# EAGLE board NerdKit (EAGLE 7.4.0)
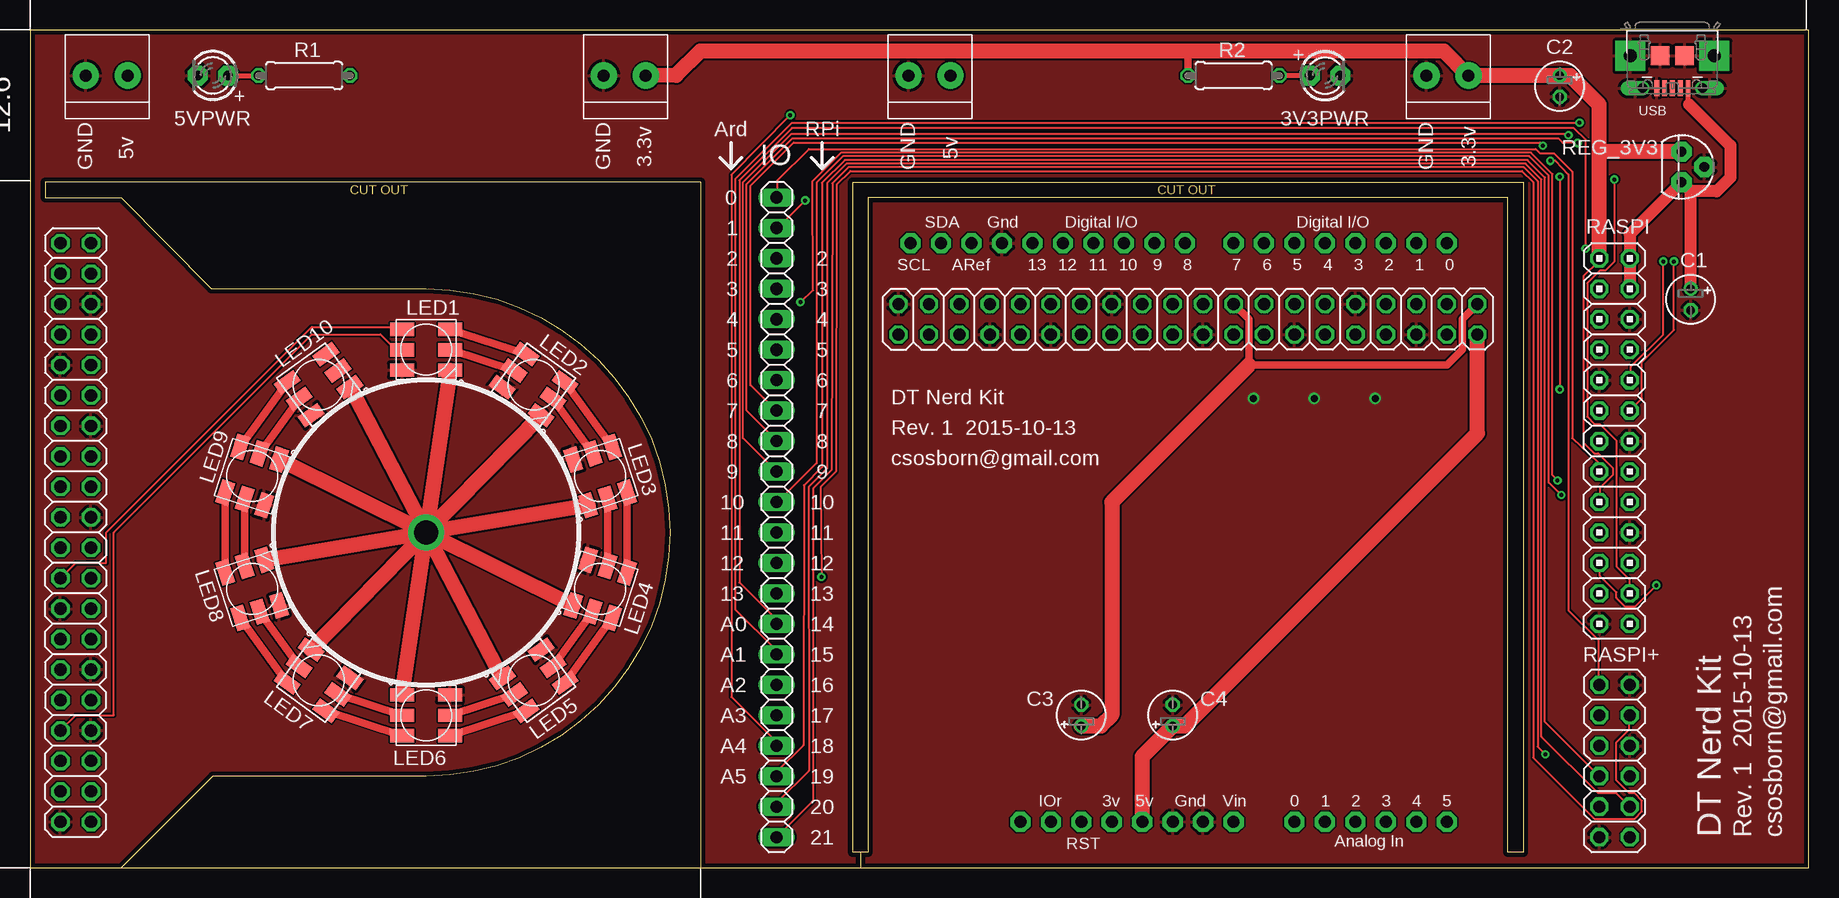
[diagram p0: board, top side]
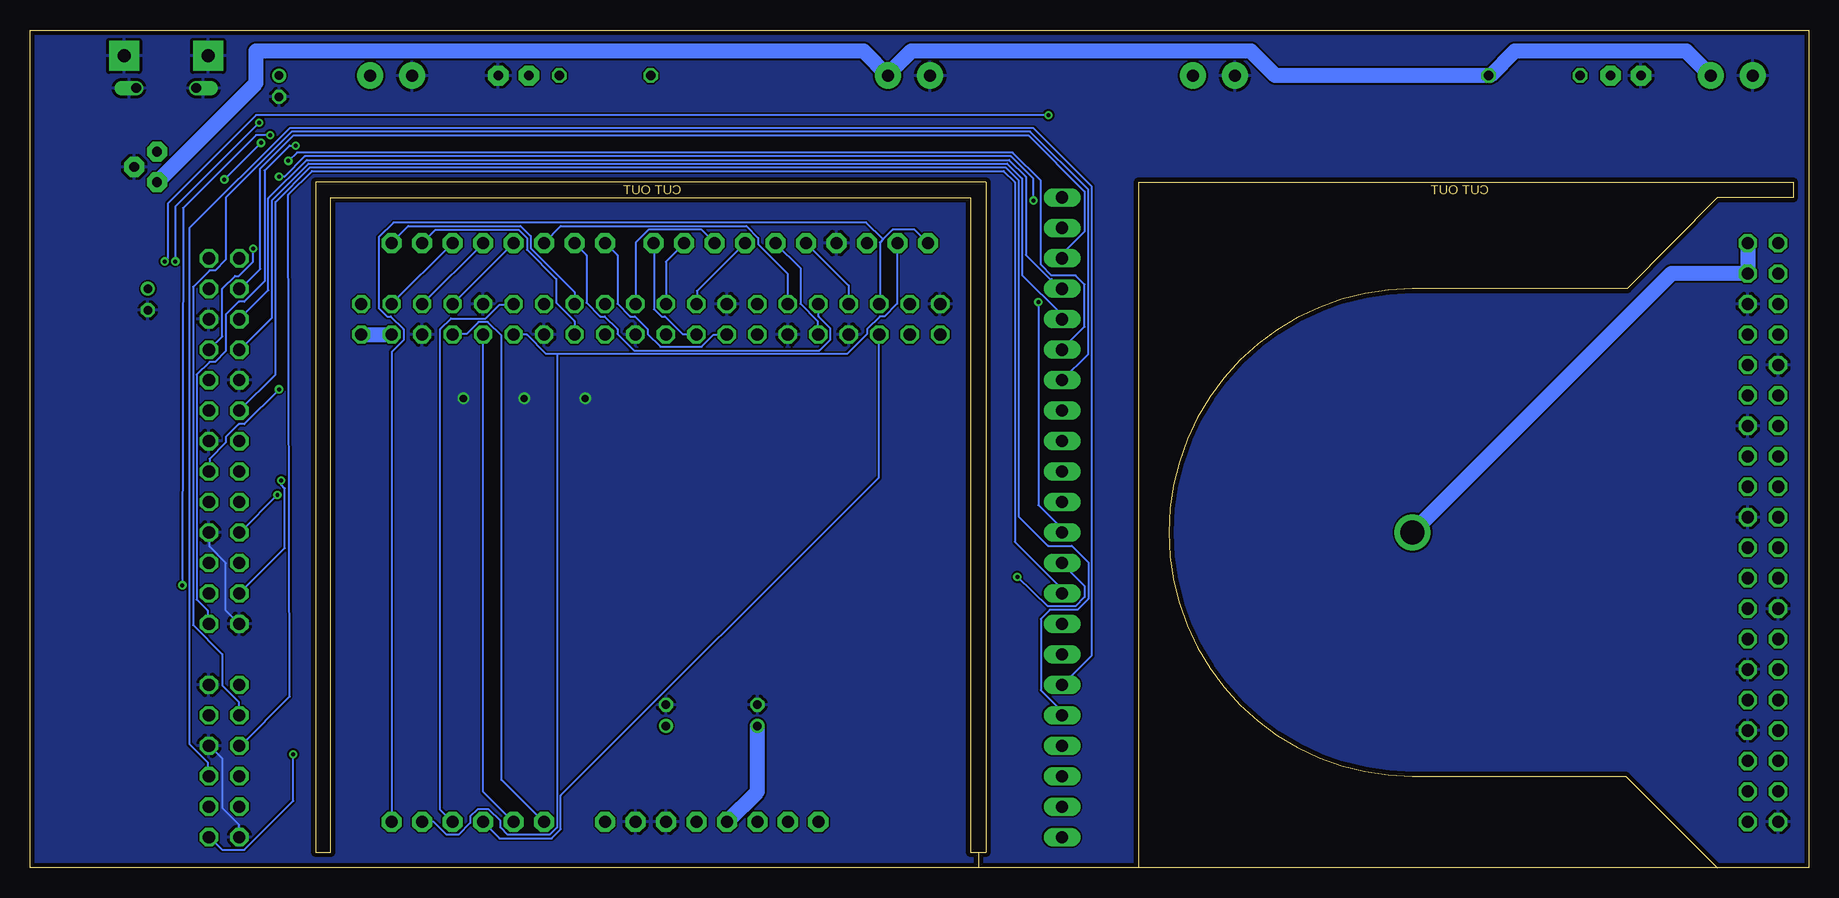
[diagram p1: board, bottom side, seen from below]

Size 148.26 x 69.84 mm. Coordinates in mm from the lower left corner, seen from the top.
Outline: 7.62,0 0,0 0,69.84 148.26,69.84 148.26,0 69.22,0
Outline: 7.62,0 55.88,0
Outline: 55.88,0 69.22,0
Outline: 55.88,0 55.88,57.15 1.27,57.15 1.27,55.88 7.62,55.88 15.11,48.26 33.02,48.26 arc-180 33.02,7.62 15.24,7.62 7.62,0
Outline: 69.22,1.27 69.85,1.27 69.85,55.88 123.19,55.88 123.19,1.27 124.46,1.27 124.46,57.15 68.58,57.15 68.58,1.27 69.22,1.27
Outline: 69.22,1.27 69.22,0
Copper layers (1*16): Top 0.0356mm / dielectric 1.5011mm / Bottom 0.0356mm
Design rules "LaenPCBOrder": minimum track width 6mil, minimum drill 13mil, track to track 6mil, track to pad 6mil, pad to pad 6mil, via to via 6mil, smd to smd 6mil, copper to edge 15mil, drill to drill 6mil, minimum pad ring 7mil, minimum via ring 7mil, stop-mask expansion 3mil, vias tented up to drill 0mil, thermal gap 10mil
Net classes: 1 GND: width 0.61 mm; 2 5V: width 0.61 mm; 3 3V3: width 0.61 mm

## Footprints (pad centres in the part's own frame; a part is rotated, then mirrored left to right if it is on the bottom)
LED3MM = drill 0.813 pad 1.676 octagon: A -1.27,0; K 1.27,0
2X20 = drill 1.016 octagon: 1 -24.13,-1.27; 2 -24.13,1.27; 3 -21.59,-1.27; 4 -21.59,1.27; 5 -19.05,-1.27; 6 -19.05,1.27; 7 -16.51,-1.27; 8 -16.51,1.27; 9 -13.97,-1.27; 10 -13.97,1.27; 11 -11.43,-1.27; 12 -11.43,1.27; 13 -8.89,-1.27; 14 -8.89,1.27; 15 -6.35,-1.27; 16 -6.35,1.27; 17 -3.81,-1.27; 18 -3.81,1.27; 19 -1.27,-1.27; 20 -1.27,1.27; 21 1.27,-1.27; 22 1.27,1.27; 23 3.81,-1.27; 24 3.81,1.27; 25 6.35,-1.27; 26 6.35,1.27; 27 8.89,-1.27; 28 8.89,1.27; 29 11.43,-1.27; 30 11.43,1.27; 31 13.97,-1.27; 32 13.97,1.27; 33 16.51,-1.27; 34 16.51,1.27; 35 19.05,-1.27; 36 19.05,1.27; 37 21.59,-1.27; 38 21.59,1.27; 39 24.13,-1.27; 40 24.13,1.27
E1,8-4 = drill 0.711 pad 1.168: + -0.889,0 | drill 0.711 pad 1.168 octagon: - 0.889,0
1X22 = drill 1.016 long: 1 -26.67,0; 2 -24.13,0; 3 -21.59,0; 4 -19.05,0; 5 -16.51,0; 6 -13.97,0; 7 -11.43,0; 8 -8.89,0; 9 -6.35,0; 10 -3.81,0; 11 -1.27,0; 12 1.27,0; 13 3.81,0; 14 6.35,0; 15 8.89,0; 16 11.43,0; 17 13.97,0; 18 16.51,0; 19 19.05,0; 20 21.59,0; 21 24.13,0; 22 26.67,0
RGBLED5050 = smd 2 x 1.1: 1 -2,1.7; 2 -2,0; 3 -2,-1.7; 4 2,-1.7; 5 2,0; 6 2,1.7
1X2-3.5MM = drill 1 pad 2.184: 1 1.8,0; 2 -1.7,0
0207/7 = drill 0.813 octagon: 1 -3.81,0; 2 3.81,0
2X13 = drill 1.016 octagon: 1 -15.24,-1.27; 2 -15.24,1.27; 3 -12.7,-1.27; 4 -12.7,1.27; 5 -10.16,-1.27; 6 -10.16,1.27; 7 -7.62,-1.27; 8 -7.62,1.27; 9 -5.08,-1.27; 10 -5.08,1.27; 11 -2.54,-1.27; 12 -2.54,1.27; 13 0,-1.27; 14 0,1.27; 15 2.54,-1.27; 16 2.54,1.27; 17 5.08,-1.27; 18 5.08,1.27; 19 7.62,-1.27; 20 7.62,1.27; 21 10.16,-1.27; 22 10.16,1.27; 23 12.7,-1.27; 24 12.7,1.27; 25 15.24,-1.27; 26 15.24,1.27
2X06 = drill 1.016 octagon: 1 -6.35,-1.27; 2 -6.35,1.27; 3 -3.81,-1.27; 4 -3.81,1.27; 5 -1.27,-1.27; 6 -1.27,1.27; 7 1.27,-1.27; 8 1.27,1.27; 9 3.81,-1.27; 10 3.81,1.27; 11 6.35,-1.27; 12 6.35,1.27
TO92 = drill 0.813 pad 1.676 octagon: 1 -1.27,0; 2 0,1.905; 3 1.27,0
ARDUINOR3_PINSONLY = drill 1 pad 1.676 octagon: 3V -6.35,-24.13; 5V -3.81,-24.13; A0 8.89,-24.13; A1 11.43,-24.13; A2 13.97,-24.13; A3 16.51,-24.13; A4 19.05,-24.13; A5 21.59,-24.13; AREF -18.034,24.13; D0 21.59,24.13; D1 19.05,24.13; D2 16.51,24.13; D3 13.97,24.13; D4 11.43,24.13; D5 8.89,24.13; D6 6.35,24.13; D7 3.81,24.13; D8 -0.254,24.13; D9 -2.794,24.13; D10 -5.334,24.13; D11 -7.874,24.13; D12 -10.414,24.13; D13 -12.954,24.13; GND -15.494,24.13; GND1 1.27,-24.13; GND2 -1.27,-24.13; IOREF -11.43,-24.13; RESERVED -13.97,-24.13; RESET -8.89,-24.13; SCL -23.114,24.13; SDA -20.574,24.13; VIN 3.81,-24.13
4UCONN_20329 = smd 1.55 x 1.55: BASE@1 -1.025,0; BASE@2 1.025,0 | smd 0.4 x 1.35: D+ 0,2.7; D- -0.65,2.7; GND 1.3,2.7; ID 0.65,2.7; VBUS -1.3,2.7 | drill 0.8 offset: SPRT@1 -2.5,2.7; SPRT@2 2.5,2.7 | drill 1.1 pad 2.5 square: SPRT@3 -3.5,0; SPRT@4 3.5,0

## Placement (x,y rotation side)
3V3PWR  RED  [LED3MM]  107.95,66.04 0 top
5VPWR  RED  [LED3MM]  15.24,66.04 180 top
ARDUINOIO  [2X20]  96.52,45.72 180 top
ARDUINOIO1  [2X20]  3.81,27.94 270 top
C1  10uF  [E1,8-4]  138.43,47.37 270 top
C2  10uF  [E1,8-4]  127.51,65.15 270 top
C3  10uF  [E1,8-4]  87.63,12.7 90 top
C4  10uF  [E1,8-4]  95.25,12.7 90 top
IO  [1X22]  62.23,29.21 270 top
LED1  RGBLED5050  [RGBLED5050]  33.02,43.18 0 top
LED2  RGBLED5050  [RGBLED5050]  41.98,40.26 324 top
LED3  RGBLED5050  [RGBLED5050]  47.52,32.64 288 top
LED4  RGBLED5050  [RGBLED5050]  47.52,23.24 252 top
LED5  RGBLED5050  [RGBLED5050]  41.99,15.62 216 top
LED6  RGBLED5050  [RGBLED5050]  33.02,12.7 180 top
LED7  RGBLED5050  [RGBLED5050]  24.05,15.62 144 top
LED8  RGBLED5050  [RGBLED5050]  18.52,23.24 108 top
LED9  RGBLED5050  [RGBLED5050]  18.52,32.64 72 top
LED10  RGBLED5050  [RGBLED5050]  24.05,40.26 36 top
PB1_TB_3V3  1X2-3.5MM  [1X2-3.5MM]  49.53,66.04 0 top
PB1_TB_5V  1X2-3.5MM  [1X2-3.5MM]  6.35,66.04 0 top
PB2_TB_3V3  1X2-3.5MM  [1X2-3.5MM]  118.11,66.04 0 top
PB2_TB_5V  1X2-3.5MM  [1X2-3.5MM]  74.93,66.04 0 top
R1  [0207/7]  22.86,66.04 0 top
R2  [0207/7]  100.33,66.04 180 top
RASPI  [2X13]  132.08,35.56 270 top
RASPI+  [2X06]  132.08,8.89 270 top
REG_3V3  L4931  [TO92]  137.67,58.42 270 top
U2  ARDUINOR3-PINSONLY  [ARDUINOR3_PINSONLY]  96.52,27.94 0 top
USB  FCI 10118194-0001LF  [4UCONN_20329]  136.91,67.69 180 top

## Library data of the parts
3V3PWR 5VPWR C1-C4 PB1_TB_3V3 PB1_TB_5V PB2_TB_3V3 PB2_TB_5V R1 R2 REG_3V3 = adafruit
ARDUINOIO ARDUINOIO1 IO RASPI RASPI+ = pinhead
LED1-LED10 U2 = osborn
USB = microbuilder

## Nets
3V3: C2.+ PB1_TB_3V3.1 PB2_TB_3V3.1 R2.2 RASPI.1 RASPI.17 REG_3V3.1
5V: C1.+ PB1_TB_5V.1 PB2_TB_5V.1 R1.2 RASPI.2 RASPI.4 REG_3V3.3 USB.VBUS
AR00: ARDUINOIO.15 U2.D0
AR01: ARDUINOIO.16 U2.D1
AR02: ARDUINOIO.3 U2.D2
AR03: ARDUINOIO.5 U2.D3
AR04: ARDUINOIO.7 U2.D4
AR05: ARDUINOIO.29 U2.D5
AR06: ARDUINOIO.31 U2.D6
AR07: ARDUINOIO.26 U2.D7
AR08: ARDUINOIO.24 U2.D8
AR09: ARDUINOIO.21 U2.D9
AR10: ARDUINOIO.19 U2.D10
AR11: ARDUINOIO.23 U2.D11
AR12: ARDUINOIO.32 U2.D12
AR13: ARDUINOIO.33 U2.D13
AR20: ARDUINOIO.38
AR21: ARDUINOIO.40
AR26: ARDUINOIO.37
AR27: ARDUINOIO.13
AR_3V3: ARDUINOIO.1 ARDUINOIO.17 C3.+ U2.3V
AR_5V: ARDUINOIO.2 ARDUINOIO.4 C4.+ U2.5V
AR_24: ARDUINOIO.18
AR_25: ARDUINOIO.22
ARA0: ARDUINOIO.8 U2.A0
ARA1: ARDUINOIO.10 U2.A1
ARA2: ARDUINOIO.36 U2.A2
ARA3: ARDUINOIO.11 U2.A3
ARA4: ARDUINOIO.12 U2.A4 U2.SDA
ARA5: ARDUINOIO.35 U2.A5 U2.SCL
GND: 3V3PWR.K 5VPWR.K ARDUINOIO1.6 ARDUINOIO1.9 ARDUINOIO1.14 ARDUINOIO1.20 ARDUINOIO1.25 ARDUINOIO1.30 ARDUINOIO1.34 ARDUINOIO1.39 ARDUINOIO.6 ARDUINOIO.9 ARDUINOIO.14 ARDUINOIO.20 ARDUINOIO.25 ARDUINOIO.30 ARDUINOIO.34 ARDUINOIO.39 C1.- C2.- C3.- C4.- LED1.3 LED2.3 LED3.3 LED4.3 LED5.3 LED6.3 LED7.3 LED8.3 LED9.3 LED10.3 PB1_TB_3V3.2 PB1_TB_5V.2 PB2_TB_3V3.2 PB2_TB_5V.2 RASPI+.2 RASPI+.6 RASPI+.11 RASPI.6 RASPI.9 RASPI.14 RASPI.20 RASPI.25 REG_3V3.2 U2.GND U2.GND1 U2.GND2 USB.BASE@1 USB.BASE@2 USB.GND USB.SPRT@1 USB.SPRT@2 USB.SPRT@3 USB.SPRT@4
GPIO02: IO.3 RASPI.3
GPIO03: IO.4 RASPI.5
GPIO04: IO.5 RASPI.7
GPIO05: IO.6 RASPI+.1
GPIO06: IO.7 RASPI+.3
GPIO07: IO.8 RASPI.26
GPIO08: IO.9 RASPI.24
GPIO09: IO.10 RASPI.21
GPIO10: IO.11 RASPI.19
GPIO11: IO.12 RASPI.23
GPIO12: IO.13 RASPI+.4
GPIO13: IO.14 RASPI+.5
GPIO14: IO.15 RASPI.8
GPIO15: IO.16 RASPI.10
GPIO16: IO.17 RASPI+.8
GPIO17: IO.18 RASPI.11
GPIO18: IO.19 RASPI.12
GPIO19: IO.20 RASPI+.7
GPIO20: IO.21 RASPI+.10
GPIO21: IO.22 RASPI+.12
GPIO22: IO.1 RASPI.15
GPIO23: IO.2 RASPI.16
GPIO24: RASPI.18
GPIO25: RASPI.22
GPIO26: RASPI+.9
GPIO27: RASPI.13
LED_MISO: ARDUINOIO1.32
LED_MOSI: ARDUINOIO1.23 LED1.1
LED_SCK: ARDUINOIO1.33 LED1.2
LED_VCC [5V]: ARDUINOIO1.2 ARDUINOIO1.4 LED1.4 LED2.4 LED3.4 LED4.4 LED5.4 LED6.4 LED7.4 LED8.4 LED9.4 LED10.4
N$1: 3V3PWR.A R2.1
N$3: LED1.6 LED2.1
N$4: LED1.5 LED2.2
N$5: LED2.6 LED3.1
N$6: LED2.5 LED3.2
N$7: LED3.6 LED4.1
N$8: LED3.5 LED4.2
N$9: LED4.6 LED5.1
N$10: LED4.5 LED5.2
N$11: LED5.6 LED6.1
N$12: LED5.5 LED6.2
N$13: LED6.6 LED7.1
N$14: LED6.5 LED7.2
N$15: LED7.6 LED8.1
N$16: LED7.5 LED8.2
N$17: LED8.6 LED9.1
N$18: LED8.5 LED9.2
N$19: LED9.6 LED10.1
N$20: LED9.5 LED10.2
N$31: 5VPWR.A R1.1
VIN: U2.VIN

## Tracks (layer width: path | path; a pad name or v marks a point on that pad's centre or on a via)
3V3
  Top 0.152: RASPI.17 130.86,30.58 130.86,31.65 131.93,32.72 131.93,33.33 130.71,34.54 130.4,34.54 129.49,35.46 129.49,49.33 130.71,50.55 RASPI.1
  Top 0.61: R2.2 96.52,68.07
  Top 1.27: PB1_TB_3V3.1 53.87,66.06 55.88,68.07 96.52,68.07 117.88,68.07 PB2_TB_3V3.1 C2.+ 128.4,66.04 130.81,63.63 130.81,59.69 | RASPI.1 130.81,59.69 | REG_3V3.1 130.81,59.69
5V
  Top 0.406: USB.VBUS 138.21,63.85 138.3,63.63
  Top 1.016: RASPI.4 RASPI.2 133.35,52.83 REG_3V3.3 138.43,56.39 | C1.+ 138.43,56.39 | 138.3,63.63 141.73,60.2 141.73,57.53 140.59,56.39 138.43,56.39
  Bottom 1.27: PB1_TB_5V.1 10.18,68.07 24.51,68.07 26.54,66.04 R1.2 44.45,66.04 46.48,68.07 74.8,68.07 76.73,66.14 PB2_TB_5V.1 78.74,68.05 78.74,68.07 129.41,68.07 129.41,65.41 REG_3V3.3
AR00
  Bottom 0.152: ARDUINOIO.15 102.87,48.01 106.53,51.66 106.53,52.65 107.37,53.49 116.74,53.49 118.11,52.12 U2.D0
AR01
  Bottom 0.152: ARDUINOIO.16 102.87,45.57 104.39,47.09 104.39,49.07 106.83,51.51 106.83,52.5 107.52,53.19 114.45,53.19 U2.D1
AR02
  Bottom 0.152: ARDUINOIO.3 118.11,47.02 113.08,52.05 U2.D2
AR03
  Bottom 0.152: ARDUINOIO.5 115.52,47.02 110.49,52.05 U2.D3
AR04
  Bottom 0.152: U2.D4 ARDUINOIO.7
AR05
  Bottom 0.152: ARDUINOIO.29 85.11,47.02 85.11,49.53 87.55,51.97 87.55,52.5 88.54,53.49 104.01,53.49 105.39,52.12 U2.D5
AR06
  Bottom 0.152: ARDUINOIO.31 82.53,46.94 82.53,45.95 81.53,44.96 81.53,44.04 82.45,43.13 97.92,43.13 99.29,44.5 99.29,44.88 100.36,45.95 100.74,45.95 101.88,47.09 101.88,51.05 102.87,52.05 U2.D6
AR07
  Bottom 0.152: ARDUINOIO.26 90.22,44.42 91.29,44.42 92.28,43.43 95.71,43.43 96.77,44.5 96.77,44.88 97.84,45.95 98.22,45.95 99.29,47.02 99.29,51.05 100.28,52.05 U2.D7
AR08
  Bottom 0.152: ARDUINOIO.24 92.73,44.5 93.88,44.5 95.33,45.95 95.63,45.95 96.24,46.56 96.24,52.05 U2.D8
AR09
  Bottom 0.152: ARDUINOIO.21 95.25,50.52 93.73,52.05 U2.D9
AR10
  Bottom 0.152: ARDUINOIO.19 97.77,47.02 97.77,52.12 96.7,53.19 92.28,53.19 91.21,52.12 U2.D10
AR11
  Bottom 0.152: ARDUINOIO.23 92.66,47.02 92.66,48.08 88.7,52.05 U2.D11
AR12
  Bottom 0.152: ARDUINOIO.32 82.6,44.5 82.6,45.57 84.05,47.02 84.05,49.99 86.11,52.05 U2.D12
AR13
  Bottom 0.152: ARDUINOIO.33 80.01,48.54 83.52,52.05 U2.D13
AR_3V3
  Top 0.61: ARDUINOIO.17 101.6,45.72 101.6,41.91 118.11,41.91 119.38,43.18 119.38,45.72 ARDUINOIO.1
  Top 1.27: C3.+ 89.28,11.81 90.17,12.7 90.17,30.48 101.6,41.91
  Bottom 0.152: 90.14,3.81 U2.3V
  Bottom 1.27: C3.+ 87.63,6.33 90.14,3.81
AR_5V
  Top 1.27: U2.5V 92.71,9.27 C4.+ 96.27,11.81 120.65,36.2 ARDUINOIO.2
  Bottom 1.27: ARDUINOIO.2 ARDUINOIO.4
ARA0
  Bottom 0.152: ARDUINOIO.8 113,44.5 111.86,44.5 110.87,45.49 110.11,45.49 108.97,44.35 108.97,7.32 105.46,3.81 U2.A0
ARA1
  Bottom 0.152: ARDUINOIO.10 110.49,6.33 107.97,3.81 U2.A1
ARA2
  Bottom 0.152: U2.A2 109.12,2.44 104.78,2.44 104.01,3.2 104.01,6.02 77.5,32.54 77.5,44.42 ARDUINOIO.36
ARA3
  Bottom 0.152: ARDUINOIO.11 107.97,46.94 109.12,46.94 110.26,45.8 113.16,45.8 114.07,44.88 114.07,4.8 113.08,3.81 U2.A3
ARA4
  Bottom 0.152: 104.32,42.82 80.16,42.82 78.49,44.5 78.49,44.88 77.42,45.95 77.04,45.95 75.97,47.02 75.97,52.05 U2.SDA | 104.32,42.82 105.23,42.82 106.83,44.42 107.9,44.42 ARDUINOIO.12 | U2.A4 114.61,3.81 113.54,2.74 112.55,2.74 111.56,3.73 111.56,4.27 110.95,4.88 110.03,4.88 109.04,3.89 109.04,3.35 108.43,2.74 104.93,2.74 104.32,3.35 104.32,42.82
ARA5
  Bottom 0.152: 77.15,52.39 76.35,53.19 74.52,53.19 U2.SCL | 77.15,52.39 77.42,52.12 77.42,47.02 ARDUINOIO.35 | U2.A5 118.11,42.98 117.12,43.97 117.12,44.88 118.19,45.95 118.49,45.95 119.18,46.63 119.18,52.58 117.96,53.8 78.56,53.8 77.15,52.39
GND  (via drill 0.6)
  Bottom 0.152: RASPI+.11 130.86,2.54 130.86,3.61 132.23,4.98 132.23,9.09 133.3,10.16 RASPI+.6 | RASPI.25 131.93,21.44 131.93,25.4 133.3,26.77 133.3,27.84 RASPI.20
  other vias: 101.98,39.12 107.06,39.12 112.14,39.12
  pour Top: 0,0 148.59,0 148.59,69.85 0,69.85
  pour Bottom: 0,0 148.59,0 148.59,69.85 0,69.85
GPIO02
  Bottom 0.152: IO.3 62.18,50.9 62.18,51.21 60.35,53.03 60.35,56.36 65.05,61.06 126.29,61.06 129.06,58.29 129.06,49.91 130.71,48.26 RASPI.3
GPIO03
  Bottom 0.152: RASPI.5 128.4,48.13 128.4,55.8 125.2,59 66.65,59 65.25,57.61 65.25,51.08 63.25,49.07 63.09,49.07 62.33,48.31 IO.4
GPIO04
  Bottom 0.152: IO.5 62.33,45.72 62.33,46.18 65.56,49.4 65.56,57.45 66.8,58.7 125.04,58.7 128.09,55.65 128.09,45.85 130.71,43.23 RASPI.7
GPIO05  (via drill 0.33)
  Top 0.152: RASPI+.1 130.71,15.34 130.71,19 128.25,21.46 128.25,57.78 127.13,58.93 v126.72,58.93
  Bottom 0.152: v126.72,58.93 126.69,58.93 126.01,59.61 66.34,59.61 64.01,57.28 64.01,50.29 63.09,49.38 61.11,49.38 60.35,48.62 60.35,45.11 62.18,43.28 IO.6
GPIO06
  Bottom 0.152: IO.7 60.05,42.82 60.05,56.52 64.9,61.37 126.44,61.37 131.93,55.88 131.93,50.7 132.84,49.78 133.3,49.78 134.67,48.41 134.67,20.22 132.23,17.78 132.23,15.19 130.86,13.82 130.86,12.75 RASPI+.3
GPIO07  (via drill 0.33)
  Top 0.152: IO.8 62.18,38.1 60.05,40.23 60.05,56.84 63.65,60.45 125.86,60.45 v126.11,60.2
  Bottom 0.152: RASPI.26 133.45,20.37 133.45,21.44 134.37,22.35 134.37,41.1 133.3,42.16 132.84,42.16 131.93,43.08 131.93,46.13 130.86,47.19 130.4,47.19 128.7,48.9 128.7,58.12 126.62,60.2 v126.11,60.2
GPIO08  (via drill 0.33)
  Top 0.152: v132.06,57.38 132.06,50.52 131.32,49.78 130.86,49.78 129.79,48.72 129.79,37.59 130.4,36.98 130.86,36.98 132.23,35.61 132.23,25.09 133.3,24.03 133.3,22.96 RASPI.24 | IO.9 62.18,35.66 59.74,38.1 59.74,57 63.55,60.81 127.38,60.81 127.76,60.43 v129.01,60.43
  Bottom 0.152: v129.01,60.43 v132.06,57.38
GPIO09  (via drill 0.33)
  Top 0.152: v135.56,23.55 133.76,21.74 132.99,21.74 132.23,22.5 132.23,22.96 130.86,24.33 130.86,25.4 RASPI.21 | IO.10 59.44,35.81 59.44,57.15 63.48,61.19 128.12,61.19 v128.25,61.06
  Bottom 0.152: v128.25,61.06 129.41,61.09 135.51,54.99 v135.56,23.55
GPIO10  (via drill 0.33)
  Top 0.152: v127.64,31.06 126.59,32.11 126.59,57.68 124.97,59.31 67.77,59.31 65.58,57.12 65.58,33.73 62.33,30.48 IO.11
  Bottom 0.152: v127.64,31.06 130.71,27.99 RASPI.19
GPIO11  (via drill 0.33)
  Top 0.152: v127.33,32.28 126.9,32.72 126.9,57.84 125.12,59.61 67.61,59.61 65.23,57.23 65.28,48.13 v64.21,47.14
  Bottom 0.152: v64.21,47.14 64.21,30.23 62.33,28.35 62.33,28.04 IO.12 | v127.33,32.28 127.33,31.93 127.03,31.62 127.03,26.64 RASPI.23
GPIO12  (via drill 0.33)
  Top 0.152: RASPI+.4 133.3,12.6 133.3,11.53 132.23,10.46 132.23,7.26 133.3,6.2 133.76,6.2 134.37,5.59 134.37,4.67 133.76,4.06 130.4,4.06 125.3,9.17 125.3,57.15 124.36,58.09 68.38,58.09 67.23,56.95 67.18,33.02 65.91,31.75 v65.96,24.23
  Bottom 0.152: v65.96,24.23 63.4,21.79 61.11,21.79 60.35,22.55 60.35,23.47 62.18,25.3 IO.13
GPIO13
  Bottom 0.152: IO.14 62.33,22.86 62.33,23.32 66.17,27.15 66.17,57.15 67.11,58.09 124.74,58.09 126.72,56.11 126.59,14.28 130.71,10.16 RASPI+.5
GPIO14  (via drill 0.33)
  Top 0.152: v129.67,51.61 129.67,60.68 128.68,61.67 63.5,61.67 59.13,57.3 59.13,23.77 62.18,20.73 62.18,20.42 IO.15
  Bottom 0.152: v129.67,51.61 129.67,50.52 130.86,49.33 131.17,49.33 132.23,48.26 132.23,44.3 RASPI.8
GPIO15  (via drill 0.33)
  Top 0.152: IO.16 62.18,17.83 62.18,18.14 58.78,21.54 58.78,57.4 63.5,62.1 v129.16,62.1 | RASPI.10 133.45,40.64 133.45,41.76 136.14,44.45 v136.14,50.55
  Bottom 0.152: v129.16,62.1 136.14,55.12 v136.14,50.55
GPIO16
  Bottom 0.152: RASPI+.8 133.45,7.72 133.45,8.79 134.98,10.31 134.98,53.31 126.59,61.67 64.62,61.67 59.74,56.79 59.74,17.68 62.18,15.24 IO.17
GPIO17
  Bottom 0.152: RASPI.11 127.79,41.12 127.79,55.5 124.89,58.4 66.95,58.4 65.86,57.3 65.86,29.29 63.4,26.82 61.42,26.82 60.05,25.45 60.05,22.4 60.96,21.49 63.25,21.49 64.01,20.73 64.01,14.78 62.33,13.11 62.33,12.8 IO.18
GPIO18  (via drill 0.33)
  Top 0.152: RASPI.12 134.37,39.12 134.37,42.19 134.39,42.19 137.03,44.83 v137.03,50.55 | IO.19 62.18,10.21 62.18,10.52 58.47,14.22 58.47,57.76 v63.37,62.74
  Bottom 0.152: v63.37,62.74 129.41,62.74 136.78,55.37 136.78,50.8 v137.03,50.55
GPIO19
  Top 0.152: RASPI+.7 126.29,12.14 126.29,57.53 124.82,59 67.92,59 66.02,57.1 66.04,33.4 64.52,31.88 64.47,10.21 62.33,8.08 62.33,7.62 IO.20
GPIO20
  Top 0.152: RASPI+.10 132.23,6.2 130.71,6.2 125.98,10.92 125.98,57.38 124.66,58.7 68.07,58.7 66.45,57.07 66.42,33.27 64.9,31.75 64.94,8.09 62.33,5.49 62.33,5.18 IO.21
GPIO21  (via drill 0.33)
  Top 0.152: v126.31,9.45 125.68,10.08 125.68,57.23 124.51,58.4 68.22,58.4 66.88,57.05 66.8,33.15 65.28,31.62 65.28,5.59 IO.22
  Bottom 0.152: v126.31,9.45 126.31,5.56 130.4,1.47 132.23,1.47 133.3,2.54 RASPI+.12
GPIO22
  Top 0.152: RASPI.15 130.71,33.02 130.71,33.78 128.55,35.81 128.55,58.01 127,59.56 125.86,59.56 125.5,59.92 64.92,59.92 62.33,57.33 62.33,55.93 IO.1
GPIO23  (via drill 0.33)
  Top 0.152: v127.51,57.61 v127.51,39.88 | v64.62,55.63 62.33,53.34 IO.2
  Bottom 0.152: v127.51,39.88 130.4,36.98 130.86,36.98 131.93,35.92 131.93,35.46 133.3,34.09 133.3,33.02 RASPI.16 | v127.51,57.61 127.05,57.61 125.35,59.31 66.5,59.31 64.62,57.43 v64.62,55.63
LED_MOSI
  Top 0.152: ARDUINOIO1.23 3.81,25.4 6.35,25.4 6.35,27.94 23.5,45.09 30.48,45.09 LED1.1
LED_SCK
  Top 0.152: ARDUINOIO1.33 3.81,12.7 6.99,12.7 6.99,27.94 23.5,44.45 29.21,44.45 30.48,43.18 LED1.2
LED_VCC  (via drill 2 pad 2.54)
  Top 1.27: LED10.4 v33.02,27.94 | LED1.4 v33.02,27.94 | LED2.4 v33.02,27.94 | LED3.4 v33.02,27.94 | LED4.4 v33.02,27.94 | LED5.4 v33.02,27.94 | LED6.4 v33.02,27.94 | LED7.4 v33.02,27.94 | LED8.4 v33.02,27.94 | LED9.4 v33.02,27.94
  Bottom 1.27: ARDUINOIO1.2 ARDUINOIO1.4 11.43,49.53 v33.02,27.94
N$1
  Top 0.406: 3V3PWR.A R2.1
N$3
  Top 0.61: LED1.6 LED2.1
N$4
  Top 0.61: LED1.5 LED2.2
N$5
  Top 0.61: LED2.6 LED3.1
N$6
  Top 0.61: LED2.5 LED3.2
N$7
  Top 0.61: LED3.6 LED4.1
N$8
  Top 0.61: LED3.5 LED4.2
N$9
  Top 0.61: LED4.6 LED5.1
N$10
  Top 0.61: LED4.5 LED5.2
N$11
  Top 0.61: LED5.6 LED6.1
N$12
  Top 0.61: LED5.5 LED6.2
N$13
  Top 0.61: LED6.6 LED7.1
N$14
  Top 0.61: LED6.5 LED7.2
N$15
  Top 0.61: LED7.6 LED8.1
N$16
  Top 0.61: LED7.5 LED8.2
N$17
  Top 0.61: LED8.6 LED9.1
N$18
  Top 0.61: LED8.5 LED9.2
N$19
  Top 0.61: LED10.1 LED9.6
N$20
  Top 0.61: LED10.2 LED9.5
N$31
  Top 0.406: 5VPWR.A R1.1

## Text on the board
Dimension: CUT OUT | CUT OUT
tNames: Ard | RPi | 5v | IO | 5v | GND | GND | 3.3v | GND | GND | 3.3v | 0 | 1 | 2 | 2 | 3 | 3 | 4 | 4 | 5 | 5 | 6 | 6 | DT Nerd Kit | 7 | 7 | Rev. 1 2015-10-13 | 8 | 8 | csosborn@gmail.com | 9 | 9 | 10 | 10 | 11 | 11 | 12 | 12 | 13 | 13 | A0 | 14 | A1 | 15 | A2 | 16 | A3 | 17 | A4 | 18 | A5 | 19 | 20 | DT Nerd Kit | Rev. 1 2015-10-13 | csosborn@gmail.com | 21